# Altium PCB Mach cau H - Phuc.PcbDoc
Units mm, origin at the board's own origin, x right, y up, seen from the top; angles counter-clockwise.
Board outline 54.1 x 98.53 mm, 2 copper layers (Top Layer, Bottom Layer); 37 components, 31 nets, 96 pads, 4 vias.
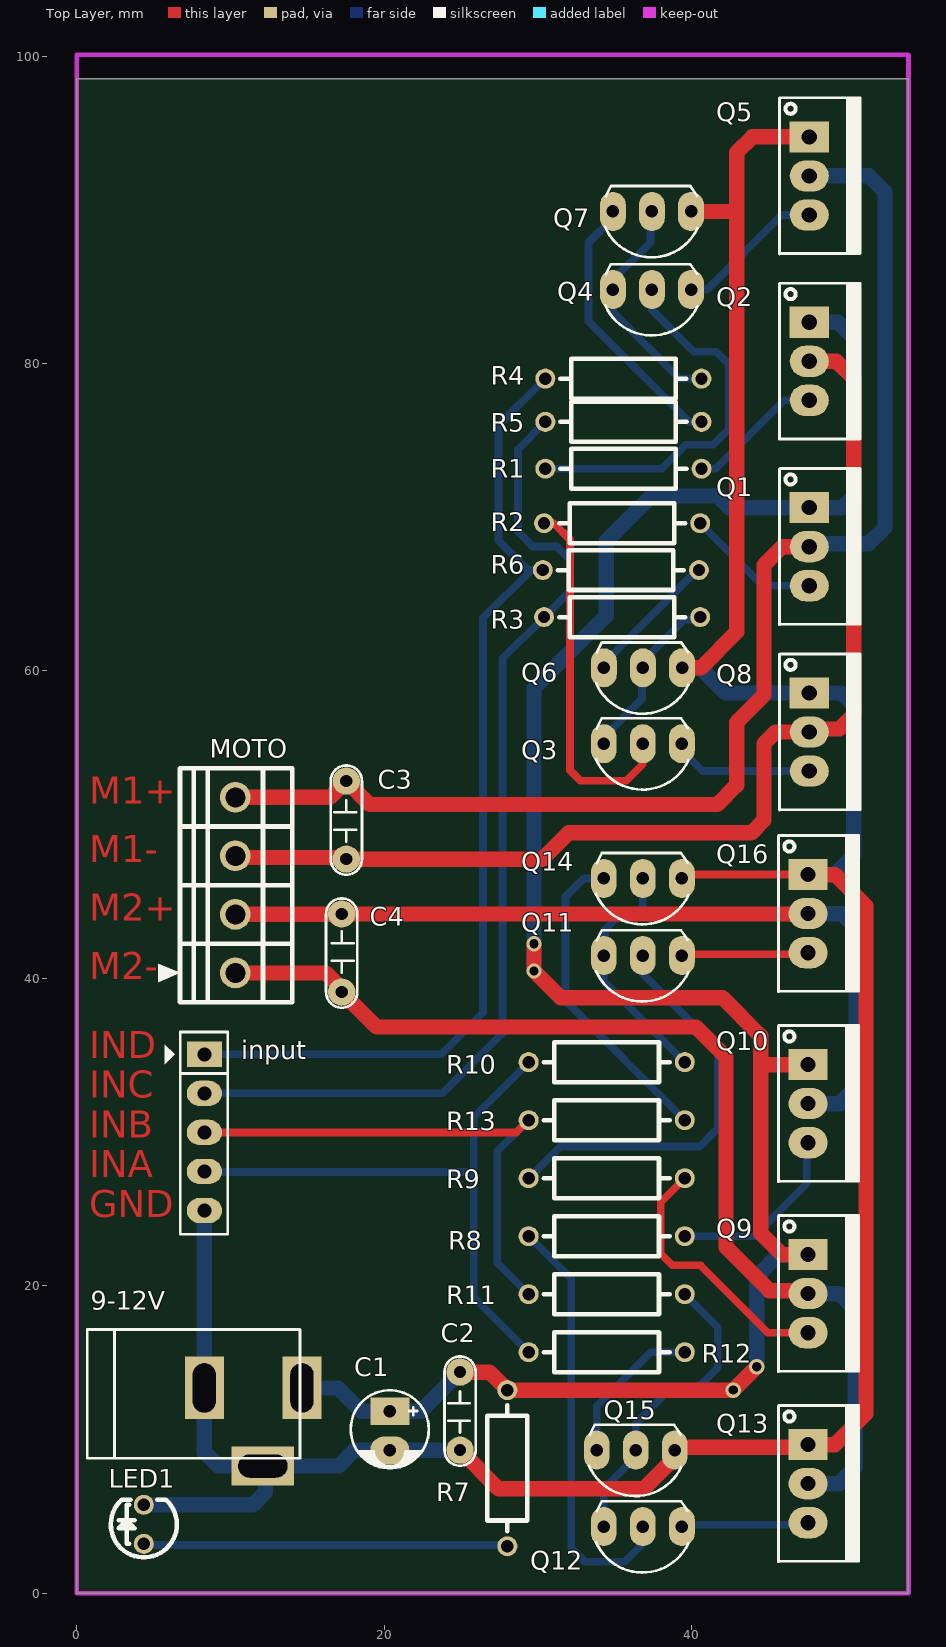
[diagram p0: Top Layer view]
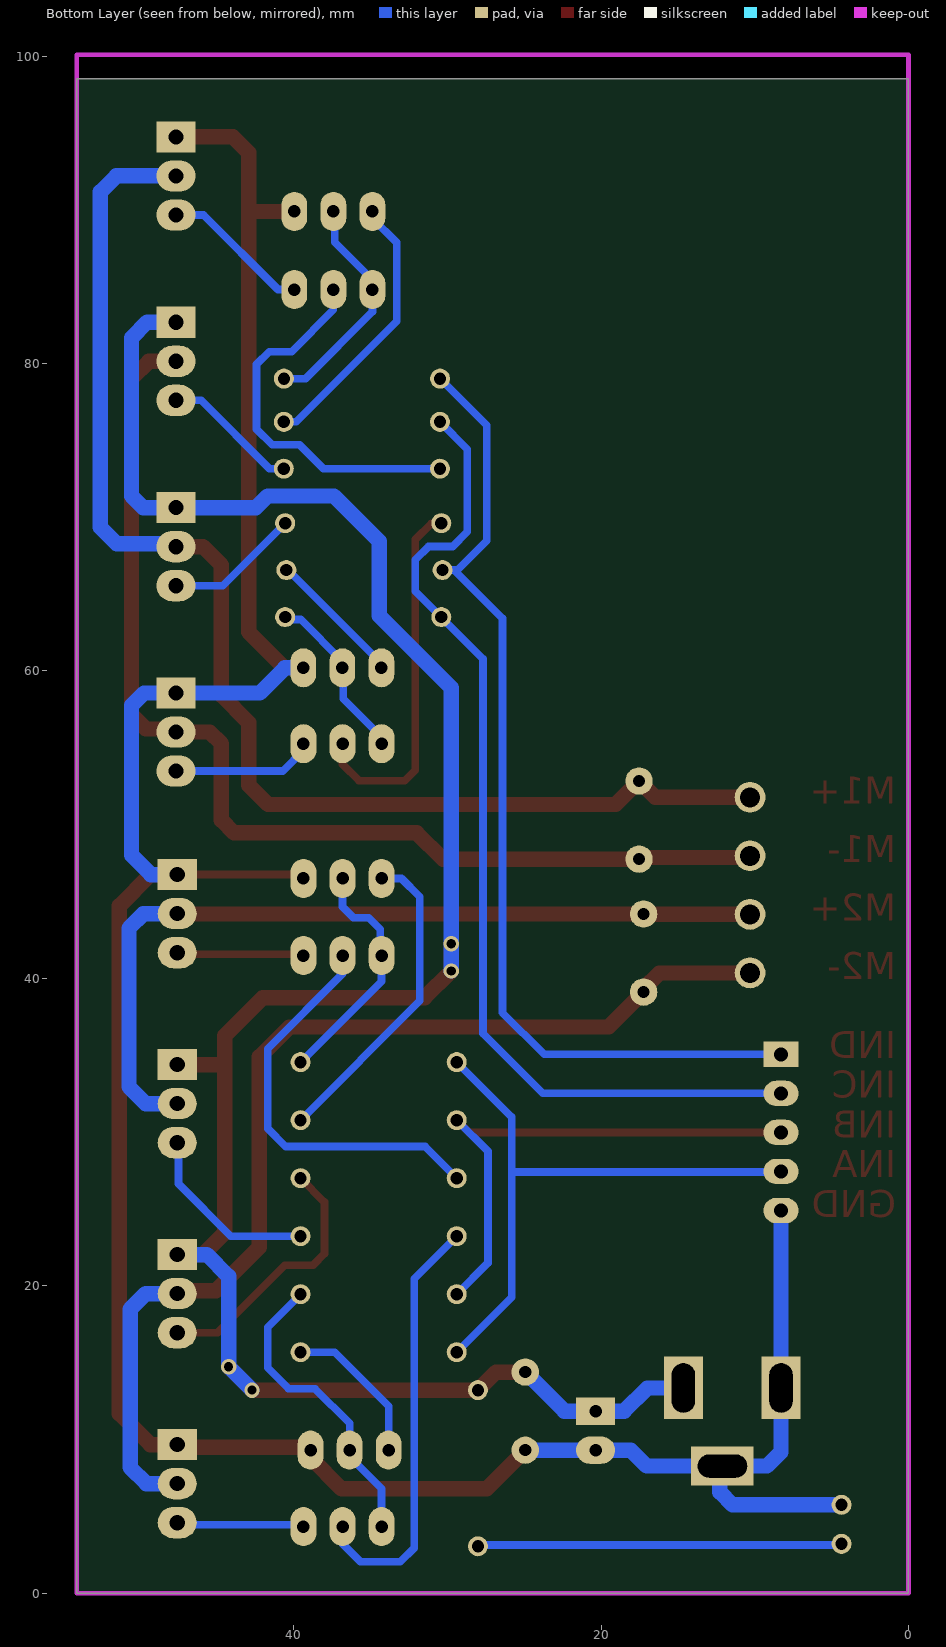
[diagram p1: Bottom Layer view, seen from below]
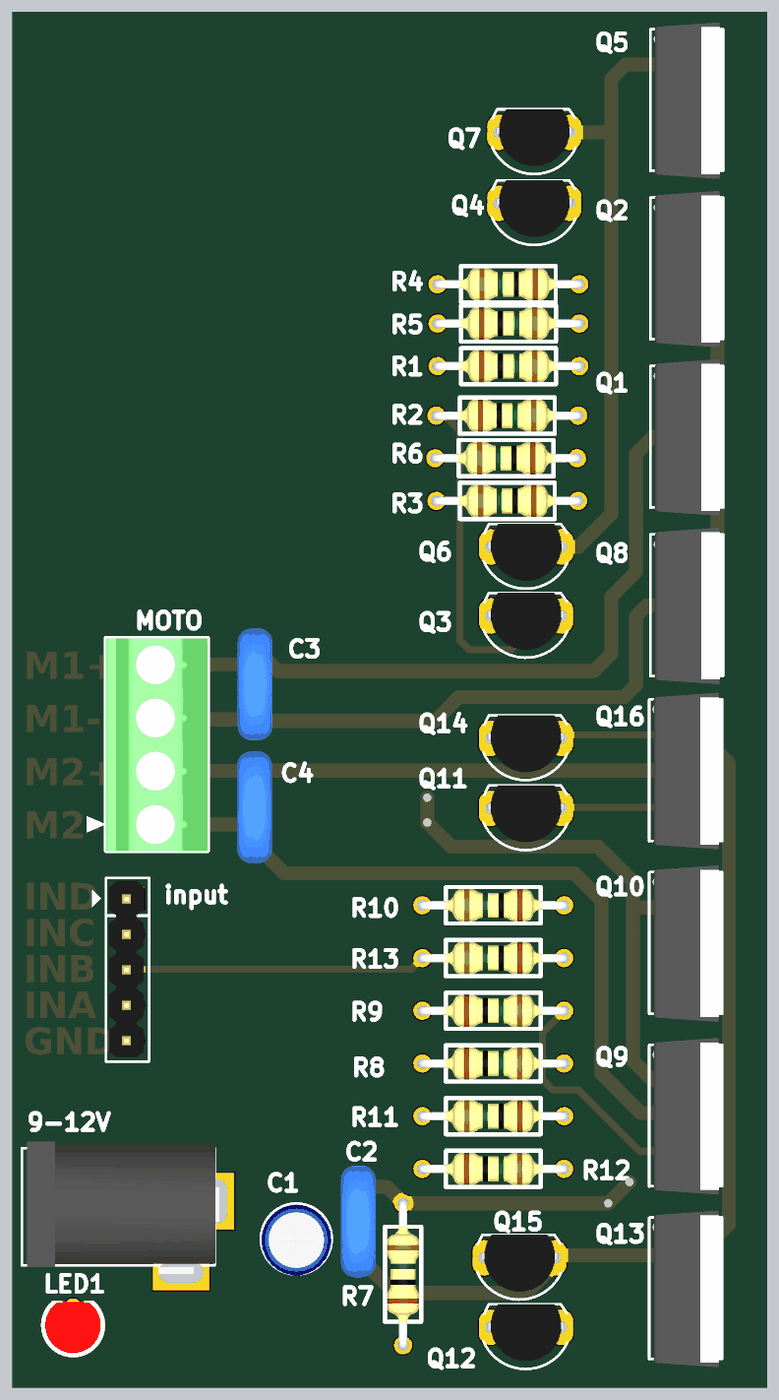
[diagram p2: 3D render of the assembled board from above, using the file's embedded part models]

## Layer stack, top to bottom
Top Solder: solder mask 0.0102, Solder Resist, Dk 3.5
Top Layer: signal copper 0.0356
Dielectric 1: dielectric 0.32, FR-4, Dk 4.8
Bottom Layer: signal copper 0.0356
Bottom Solder: solder mask 0.0102, Solder Resist, Dk 3.5

## Board outline
0,0 0,98.527 54.102,98.527 54.102,0

## Design rules (kind name [scope] priority, off if disabled: settings)
Clearance [All] p1: gap=0.5 ignorepadtopadclearanceinfootprint=TRUE
PolygonConnect [All] p1: connectstyle=Relief reliefconductorwidth=0.254 reliefentries=4 polygonreliefangle="90 Angle" airgapwidth=0.254
RoutingVias POWER [All] p1: holewidth=0.6 width=1 viastyle="Through Hole" minholewidth=0.6 minwidth=1 maxholewidth=0.6 maxwidth=1
SolderMaskExpansion [All] p1: expansion=0.102
Width POWER_1 [InNetClass('POWER')] p1: maxlimit=1.5 minlimit=0.5 preferedwidth=1
Width SIGNAL [All] p2: maxlimit=0.5 minlimit=0.3 preferedwidth=0.3
30 further rules are at their usual default settings.

## Classes and differential pairs
net class POWER: GND M_A M_B M_C M_D VCC

## Components (designator, comment, footprint, x,y, rotation, side; value= is the part's Value field where it differs from the comment)
9-12V "Jac DC" DC-IN 11.466,10.807 r0 top
C1 "10uF" CP1/2 20.357,11.841 r270 top value=10uF/50V
C2 "104" CN2 24.929,9.301 r90 top value=0.1uF
C3 "104" CN2 17.526,47.752 r90 top value=0.1uF
C4 "104" CN2 17.231,44.182 r270 top value=0.1uF
input "JP5" JP5 8.291,35.052 r270 top value="Connector 5"
LED1 "LT0668" LED3R 4.355,3.205 r90 top value=Red
MOTO "JP4" DOMINO-MKDS-4-PIN 10.309,40.347 r90 top value="Connector 4"
Q1 "2SA1015" QTO-220 47.648,70.623 r270 top
Q2 "2SA1015" QTO-220 47.648,82.682 r270 top
Q3 "C1815" QTO-92 36.82,55.261 r180 top
Q4 "C1815" QTO-92 37.414,84.81 r180 top
Q5 "C1815" QTO-220 47.648,94.742 r270 top
Q6 "C1815" QTO-92 36.83,60.198 r180 top
Q7 "C1815" QTO-92 37.414,89.89 r180 top
Q8 "C1815" QTO-220 47.648,58.563 r270 top
Q9 "2SA1015" QTO-220 47.573,22.024 r270 top
Q10 "2SA1015" QTO-220 47.573,34.386 r270 top
Q11 "C1815" QTO-92 36.82,41.478 r180 top
Q12 "C1815" QTO-92 36.82,4.329 r180 top
Q13 "C1815" QTO-220 47.573,9.663 r270 top
Q14 "C1815" QTO-92 36.82,46.493 r180 top
Q15 "C1815" QTO-92 36.359,9.301 r180 top
Q16 "C1815" QTO-220 47.573,46.747 r270 top
R1 "Res2" "RES 1/4W CFR25" 30.48,73.152 r0 top value=1K
R2 "Res2" "RES 1/4W CFR25" 30.393,69.607 r0 top value=1K
R3 "Res2" "RES 1/4W CFR25" 40.553,63.5 r180 top value=1K
R4 "Res2" "RES 1/4W CFR25" 40.633,79.014 r180 top value=1K
R5 "Res2" "RES 1/4W CFR25" 30.48,76.2 r0 top value=1K
R6 "Res2" "RES 1/4W CFR25" 40.473,66.559 r180 top value=1K
R7 "Res2" "RES 1/4W CFR25" 28.007,3.048 r90 top value=1K
R8 "Res2" "RES 1/4W CFR25" 29.389,23.222 r0 top value=1K
R9 "Res2" "RES 1/4W CFR25" 29.389,26.996 r0 top value=1K
R10 "Res2" "RES 1/4W CFR25" 39.549,34.544 r180 top value=1K
R11 "Res2" "RES 1/4W CFR25" 39.549,19.448 r180 top value=1K
R12 "Res2" "RES 1/4W CFR25" 29.389,15.674 r0 top value=1K
R13 "Res2" "RES 1/4W CFR25" 39.549,30.77 r180 top value=1K

## Footprints (in the part's own frame and the unit in brackets; to place one, negate y for a bottom-side part, rotate by r counter-clockwise, add the part's x,y. Pads: shape width x height; smd on the part's side, far side on the other; paste and mask are expansions set on the pad)
CN2 [mil]
  round 70 hole 31: 1(0,0) 2(200,0)
  silkscreen extent -40,-40 240,40, body extent -54,-44 260,55, height 407
CP1/2 [mil] "Tu hoa < 22uF/16>50V"
  rect 70x100 hole 32: 1(0,0)
  oval 70x100 hole 32: 2(100,0)
  silkscreen extent -53,-100 146,100, body extent -49,-99 149,99, height 287
DC-IN [mm] "Jac DC input"
  rect 2.54x4.064 hole 1.5 slot 3.2 at 90 deg: 1(3.175,2.54) 2(-3.175,2.54)
  rect 4.064x2.54 hole 1.5 slot 3.2 at 0 deg: 3(0.635,-2.54)
  silkscreen extent -10.79,-2.03 3.05,6.35, body extent -10.42,-2.67 3.4,6.84, height 11.02
DOMINO-MKDS-4-PIN [mm] "DOMINO 4 PIN, PIN TO PIN 3.81MM"
  round 2 hole 1.3 mask+0.1: 1(0,0) 2(3.81,0) 3(7.62,0) 4(11.43,0)
  silkscreen extent -1.9,-3.7 13.33,5, body extent -1.92,-3.7 13.32,3.6, height 8.5
JP5 [mil] "JP5"
  rect 65x90 hole 36: 1(0,0)
  oval 65x90 hole 36: 2(100,0) 3(200,0) 4(300,0) 5(400,0)
  silkscreen extent -57,-101 461,60, body extent -48,-53 448,45, height 323
LED3R [mm] "LED 3mm_RED"
  round 1.3 hole 0.8: 1(0,0) 2(2.54,0)
  silkscreen extent -0.88,-2.15 2.87,2.15, body extent -0.73,-2 2.94,2, height 4.6
QTO-92 [mil] "TO-92"
  oval 66x100 hole 32: 1(-100,0) 2(0,0) 3(100,0)
  silkscreen extent -117,-65 120,118, body extent -109,-66 109,95, height 245
QTO-220 [mil] "TO-220 - 1-2-3"
  rect 80x100 hole 39: 1(0,0)
  oval 80x100 hole 39: 2(100,0) 3(200,0)
  silkscreen extent -100,-76 300,130, body extent -119,-64 322,121, height 755
"RES 1/4W CFR25" [mm] "Axial Device, Thru-Hole; 2 Leads fi 0.55"
  round 1.3 hole 0.8 mask+0.1: 1(0,0) 2(10.16,0)
  silkscreen extent 0.98,-1.3 9.18,1.3, body extent -0.3,-1.16 10.47,1.16, height 2.93

## Part data
9-12V: library part DCIN, "Jac DC input"
C1: library part CP1, "Cap P  0,1uF < 22uF , 16 - 50V", Description 1="10 => 220uF/6,3V/10V - 10uF => 100uF/16V", Description 2="0,1uF => 33uF/50V - 10uF => 22uF/63V", Description 3="0,47uF => 10uF/100V"
C2 C3 C4: library part CN2, "Cap np 104 => 105pF"
input: library part Con5, "Connector 5"
LED1: "LED Red 2mA 2.0V 3mm", ComponentLink1Description=Datasheet, ComponentLink1URL="D:\Dropbox\Datasheets\Opto and Illumination\LEDs\LT0668.pdf", Unit Price=0.0067
MOTO: library part Con4, "Connector 4"
Q1 Q2 Q9 Q10: "Trans PNP -50V -150mA TO-92", ComponentLink1Description=Datasheet, ComponentLink1URL="D:\Dropbox\Datasheets\Transistors\N Channel Bipolar\2SA1015.pdf", Unit Price=0.0143
Q3 Q4 Q5 Q6 Q7 Q8 Q11 Q12 Q13 Q14 Q15 Q16: "NPN 600mW, ECB", =C2383
R1 R2 R3 R4 R5 R6 R7 R8 R9 R10 R11 R12 R13: "Resistor", LatestRevisionDate=17-Jul-2002, LatestRevisionNote="Re-released for DXP Platform.", PackageDescription="Axial Device, Thru-Hole; 2 Leads; 0.4 in Pin Spacing", PackageReference=AXIAL-0.4, Published=8-Jun-2000, Publisher="Altium Limited"

## Via types
v1: diameter 1, hole 0.6, Top Layer to Bottom Layer, tented both sides, 4 vias

## Nets (pads, with @x,y where several pads share a name; then routed paths per layer and width w, separated by ;. In a path a pad name is that pad's centre, name@x,y a point inside that pad or via, vN(x,y) a via of type N, cw(c..) or ccw(c..) an arc to the next point about the centre after c; other vN are vias at no path point)
GND: 9-12V.2 9-12V.3 C1.2 C2.1 input.5 LED1.2 Q5.1 Q6.1 Q7.1 Q8.1 Q13.1 Q14.1 Q15.1 Q16.1 | length 188.2
  Top Layer w0.5: Q14.1@39.614,46.747 Q16.1
  Top Layer w1: C2.1 27.441,6.789 36.879,6.789 38.899,8.81 Q15.1 39.08,9.482 47.392,9.482 Q13.1 49.324,9.663 51.343,11.681 51.343,44.717 49.313,46.747 Q16.1 ; Q6.1 40.591,60.198 42.926,62.533 42.926,90.036 ; Q7.1 42.78,89.89 42.926,90.036 ; Q5.1 43.942,94.742 42.926,93.726 42.926,90.036
  Bottom Layer w0.5: Q14.1 Q14.1@39.614,46.747
  Bottom Layer w1: LED1.2 11.451,5.745 12.275,6.569 12.275,8.093 9-12V.3 ; input.5 9-12V.2 8.291,9.175 9.199,8.267 9-12V.3 ; C2.1 C1.2 18.071,9.301 17.037,8.267 9-12V.3 ; Q6.1 40.567,60.198 42.201,58.563 Q8.1 49.737,58.563 50.547,57.753 50.547,48.007 49.287,46.747 Q16.1
IN_A: input.1 R4.2 R6.2 | length 64.8
  Bottom Layer w0.5: input.1 23.697,35.052 26.416,37.771 26.416,63.418 29.556,66.559 ; R6.2 29.556,66.559 ; R4.2 27.432,75.973 27.432,68.476 29.35,66.559 29.556,66.559
IN_B: input.2 R3.2 R5.1 | length 65.7
  Bottom Layer w0.5: input.2 23.786,32.512 27.686,36.412 27.686,60.793 R3.2 32.084,65.191 32.084,67.23 31.223,68.091 29.655,68.091 28.702,69.044 28.702,74.422 R5.1
IN_C: input.3 R11.2 R13.2 | length 34.4
  Top Layer w0.5: input.3 28.591,29.972 R13.2
  Bottom Layer w0.5: R11.2 27.357,21.48 27.357,28.738 R13.2
IN_D: input.4 R10.2 R12.1 | length 39.4
  Bottom Layer w0.5: input.4 8.328,27.396 25.818,27.396 ; R12.1 25.818,19.245 25.818,27.396 ; R10.2 25.818,30.973 25.818,27.396
M_A: C3.1 MOTO.3 Q2.2 Q8.2 | length 72.4
  Top Layer w1: MOTO.3 10.416,47.86 17.418,47.86 C3.1 30.281,47.752 31.996,49.467 43.879,49.467 44.704,50.292 44.704,55.261 45.466,56.023 Q8.2 47.845,56.221 49.617,56.221 50.546,57.15 50.546,79.014 49.422,80.138 47.652,80.138 Q2.2
M_B: C3.2 MOTO.4 Q1.2 Q5.2 | length 85.3
  Top Layer w1: MOTO.4 16.471,51.777 C3.2 19.05,51.308 41.672,51.308 42.926,52.562 42.926,56.642 44.704,58.42 44.704,66.89 45.897,68.083 Q1.2
  Bottom Layer w1: Q1.2 47.845,68.28 51.516,68.28 52.578,69.342 52.578,91.16 51.536,92.202 Q5.2
M_C: C4.1 MOTO.2 Q10.2 Q16.2 | length 55
  Top Layer w1: MOTO.2 10.321,44.169 17.218,44.169 C4.1 Q16.2@47.573,44.182
  Bottom Layer w1: Q10.2 49.626,31.846 50.712,32.932 50.712,43.268 49.784,44.196 47.77,44.196 47.77,44.404 Q16.2
M_D: C4.2 MOTO.1 Q9.2 Q13.2 | length 70.6
  Top Layer w1: MOTO.1 16.203,40.347 17.231,39.319 C4.2 19.503,36.83 40.281,36.83 42.227,34.884 42.227,22.507 45.052,19.682 47.376,19.682 Q9.2
  Bottom Layer w1: Q13.2 49.578,7.123 50.637,8.182 50.637,18.468 49.621,19.484 Q9.2
NetLED1_1: LED1.1 R7.1 | length 23.7
  Bottom Layer w0.5: LED1.1 4.434,3.127 27.929,3.127 R7.1
NetQ1_3: Q1.3 R2.2 | length 8.8
  Bottom Layer w0.5: R2.2 44.617,65.543 Q1.3
NetQ2_3: Q2.3 R1.2 | length 8.9
  Bottom Layer w0.5: R1.2 41.569,73.152 46.02,77.602 Q2.3
NetQ3_2: Q3.2 R2.1 | length 23.9
  Top Layer w0.5: R2.1 31.025,69.607 32.084,68.548 32.084,53.53 32.766,52.848 35.744,52.848 36.82,53.924 Q3.2
NetQ3_3: Q3.3 Q6.2 R3.1 | length 11.3
  Bottom Layer w0.5: Q3.3 34.28,55.693 36.765,58.178 36.765,60.133 Q6.2 36.83,60.63 39.547,63.347 40.4,63.347 R3.1
NetQ4_2: Q4.2 R1.1 | length 25
  Bottom Layer w0.5: R1.1 38.055,73.152 39.616,74.713 41.401,74.713 42.418,75.73 42.418,79.944 41.59,80.772 40.132,80.772 37.414,83.49 Q4.2
NetQ4_3: Q4.3 Q7.2 R4.1 | length 15.1
  Bottom Layer w0.5: Q7.2 37.324,89.801 37.324,87.884 34.874,85.434 Q4.3 34.874,83.368 39.228,79.014 R4.1
NetQ6_3: Q6.3 R6.1 | length 9
  Bottom Layer w0.5: Q6.3 34.29,60.503 40.346,66.559 R6.1
NetQ7_3: Q7.3 R5.2 | length 17.9
  Bottom Layer w0.5: Q7.3 34.874,89.459 33.286,87.87 33.286,82.747 39.833,76.2 R5.2
NetQ9_3: Q9.3 R9.2 | length 17.3
  Top Layer w0.5: R9.2 37.995,25.442 37.995,22.083 38.743,21.336 40.568,21.336 44.959,16.944 Q9.3
NetQ10_3: Q10.3 R8.2 | length 12.1
  Bottom Layer w0.5: R8.2 44.088,23.222 47.493,26.628 47.493,29.226 Q10.3
NetQ11_2: Q11.2 R9.1 | length 26.9
  Bottom Layer w0.5: R9.1 31.445,29.052 40.519,29.052 41.693,30.226 41.693,35.418 36.82,40.292 Q11.2
NetQ11_3: Q11.3 Q14.2 R10.1 | length 15.8
  Bottom Layer w0.5: Q14.2 36.82,44.656 36.105,43.942 35.107,43.942 34.363,43.198 34.363,41.562 Q11.3 34.28,39.814 R10.1
NetQ12_2: Q12.2 R8.1 | length 28.1
  Bottom Layer w0.5: R8.1 32.154,20.457 32.154,2.935 33.057,2.032 35.648,2.032 36.82,3.204 Q12.2
NetQ12_3: Q12.3 Q15.2 R11.1 | length 20.1
  Bottom Layer w0.5: Q12.3 34.28,6.789 36.359,8.869 Q15.2 36.359,11.046 38.615,13.302 40.329,13.302 41.693,14.666 41.693,17.304 R11.1
NetQ14_3: Q14.3 R13.1 | length 20.7
  Bottom Layer w0.5: Q14.3 32.981,46.493 31.787,45.299 31.787,38.532 R13.1
NetQ15_3: Q15.3 R12.2 | length 10
  Bottom Layer w0.5: Q15.3 33.819,12.156 37.337,15.674 R12.2
TA: Q4.1 Q5.3 | length 9.7
  Bottom Layer w0.5: Q4.1 41.016,84.81 45.867,89.662 Q5.3
TB: Q3.1 Q8.3 | length 9.3
  Bottom Layer w0.5: Q3.1 39.36,54.829 40.706,53.483 Q8.3
TC: Q12.1 Q13.3 | length 8.3
  Bottom Layer w0.5: Q12.1 39.487,4.456 47.446,4.456 Q13.3
TD: Q11.1 Q16.3 | length 7.9
  Top Layer w0.5: Q11.1@39.519,41.573 Q16.3@47.446,41.573
VCC: 9-12V.1 C1.1 C2.2 Q1.1 Q2.1 Q9.1 Q10.1 R7.2 | length 143.8
  Top Layer w1: C2.2 26.834,14.381 R7.2 v1(42.709,13.208) v1(44.233,14.732) ; v1(29.743,42.252) v1(29.743,40.473) 31.475,38.742 42.004,38.742 44.487,36.258 44.487,34.386 ; Q9.1 45.888,22.024 44.487,23.425 44.487,34.386 ; Q10.1 44.487,34.386
  Bottom Layer w1: 9-12V.1 16.986,13.347 18.492,11.841 C1.1 22.389,11.841 C2.2 ; R7.2 R7.2@28.007,13.302 ; v1(29.743,40.473) v1(29.743,42.252) 29.743,58.897 34.43,63.583 34.43,68.43 37.375,71.375 41.695,71.375 42.447,70.623 Q1.1 49.795,70.623 50.547,71.375 50.547,81.665 49.53,82.682 Q2.1 ; v1(42.709,13.208) v1(44.233,14.732) 44.233,20.611 45.646,22.024 Q9.1

## Keep-outs
Keep-Out Layer:
  lines w0.3: 0,0 0,100.076 54.102,100.076 54.102,0 0,0

## Other copper
Top Layer:
  text "M1+" at 0.799,50.777 h3
  text "M1-" at 0.799,46.967 h3
  text "M2+" at 0.799,43.157 h3
  text "M2-" at 0.799,39.347 h3
  text "IND" at 0.799,34.227 h3
  text "INC" at 0.799,31.639 h3
  text "INB" at 0.799,29.051 h3
  text "INA" at 0.799,26.464 h3
  text "GND" at 0.799,23.876 h3

## Dimensions
0,0 to 54.102,0 on Mechanical 15
0,100.076 to 0,0 on Mechanical 15

## Text inside footprints (layer, text, board x,y; h text height)
MOTO: Mechanical 1 "1" at 10.709,40.262 h1 r90; Mechanical 1 "4" at 10.809,51.362 h1 r90; Mechanical 1 "CN?" at 10.309,46.062 h1 r90
R1: Mechanical 1 "R?" at 30.56,73.152 h0.5
R2: Mechanical 1 "R?" at 30.473,69.607 h0.5
R3: Mechanical 1 "R?" at 40.473,63.5 h0.5 r180
R4: Mechanical 1 "R?" at 40.553,79.014 h0.5 r180
R5: Mechanical 1 "R?" at 30.56,76.2 h0.5
R6: Mechanical 1 "R?" at 40.393,66.559 h0.5 r180
R7: Mechanical 1 "R?" at 28.007,3.128 h0.5 r90
R8: Mechanical 1 "R?" at 29.469,23.222 h0.5
R9: Mechanical 1 "R?" at 29.469,26.996 h0.5
R10: Mechanical 1 "R?" at 39.469,34.544 h0.5 r180
R11: Mechanical 1 "R?" at 39.469,19.448 h0.5 r180
R12: Mechanical 1 "R?" at 29.469,15.674 h0.5
R13: Mechanical 1 "R?" at 39.469,30.77 h0.5 r180